# Altium PCB v1.5 PCB For Assembly Sheme.PcbDoc
Units mm, origin at the board's own origin, x right, y up, seen from the top; angles counter-clockwise.
Board outline 35.67 x 48.94 mm, 4 copper layers (Top Power Plane, Internal Ground Plane, Internal Signal Plane, Bottom Signal Layer), stack 0.972 mm thick; 78 components, 63 nets, 310 pads, 18 vias.
Unrouted connection lines stored in the file: 198.
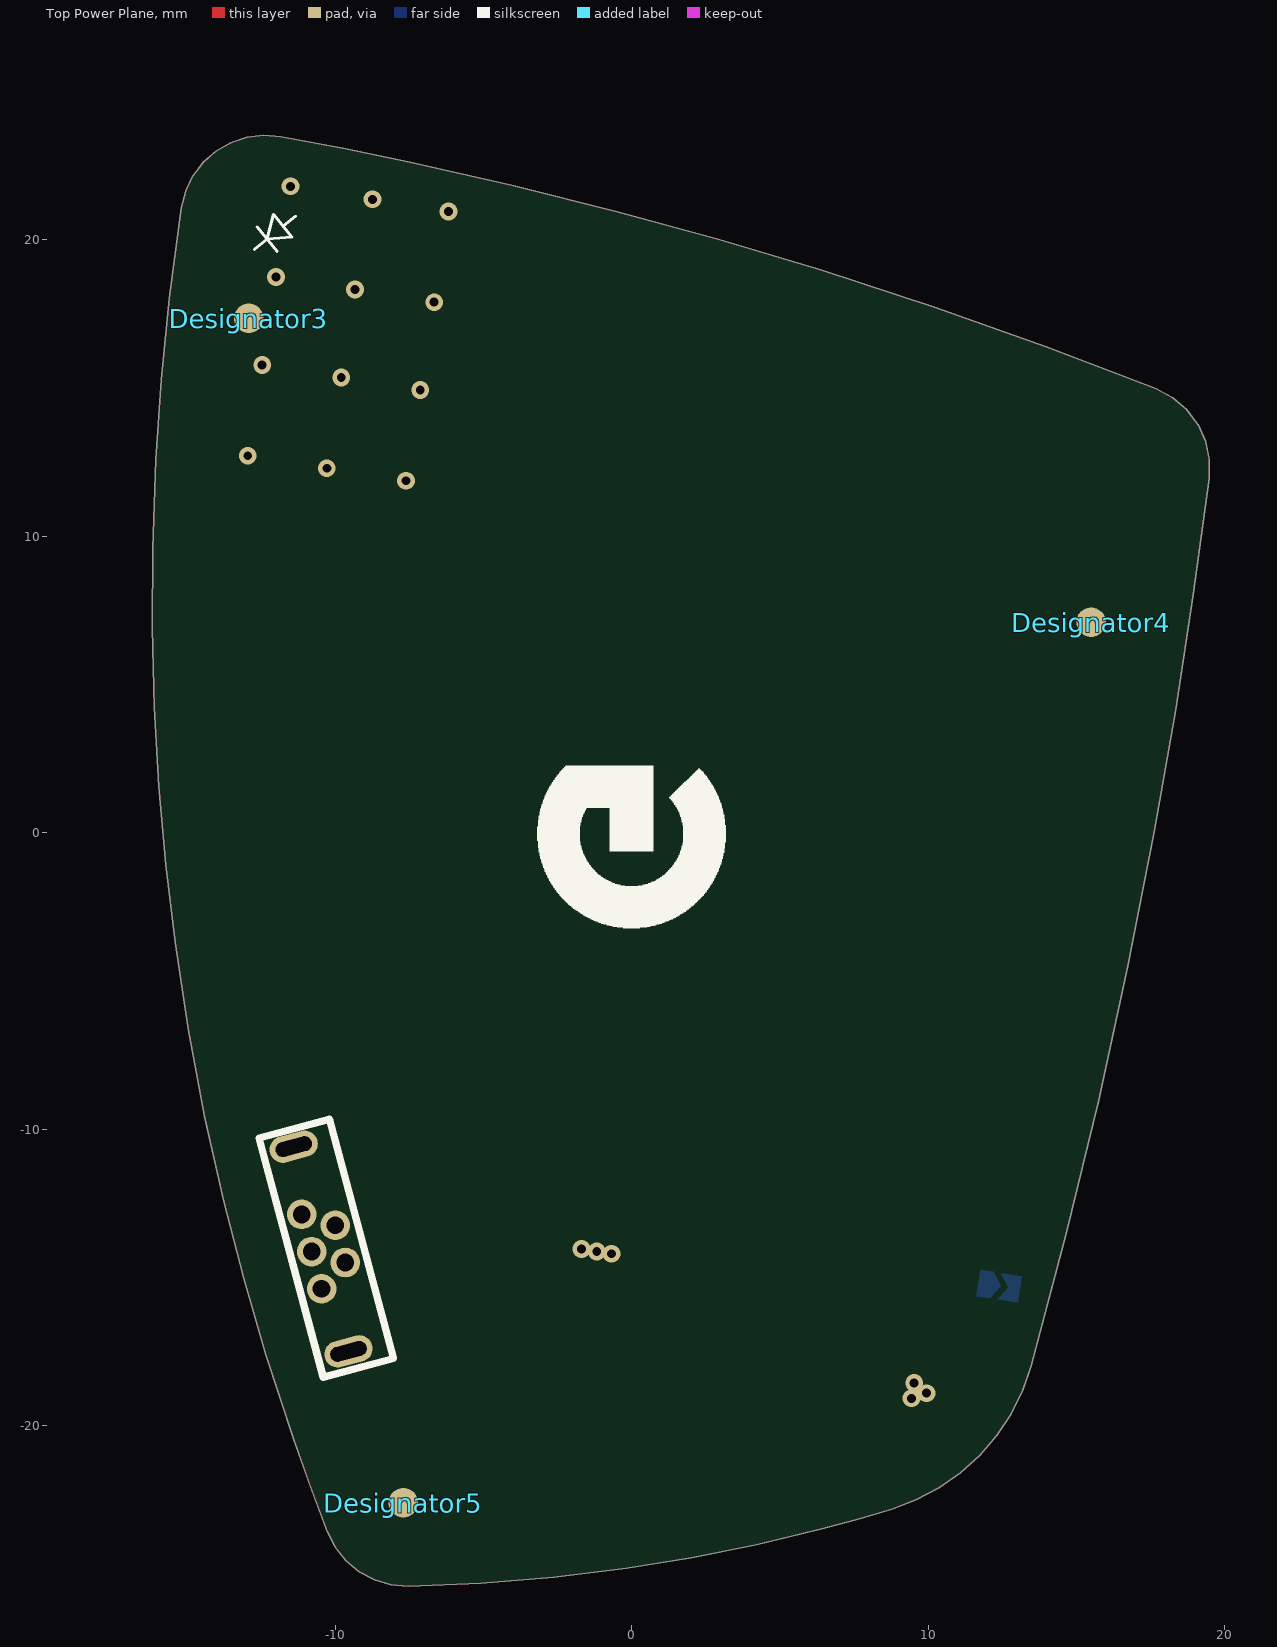
[diagram p0: Top Power Plane view]
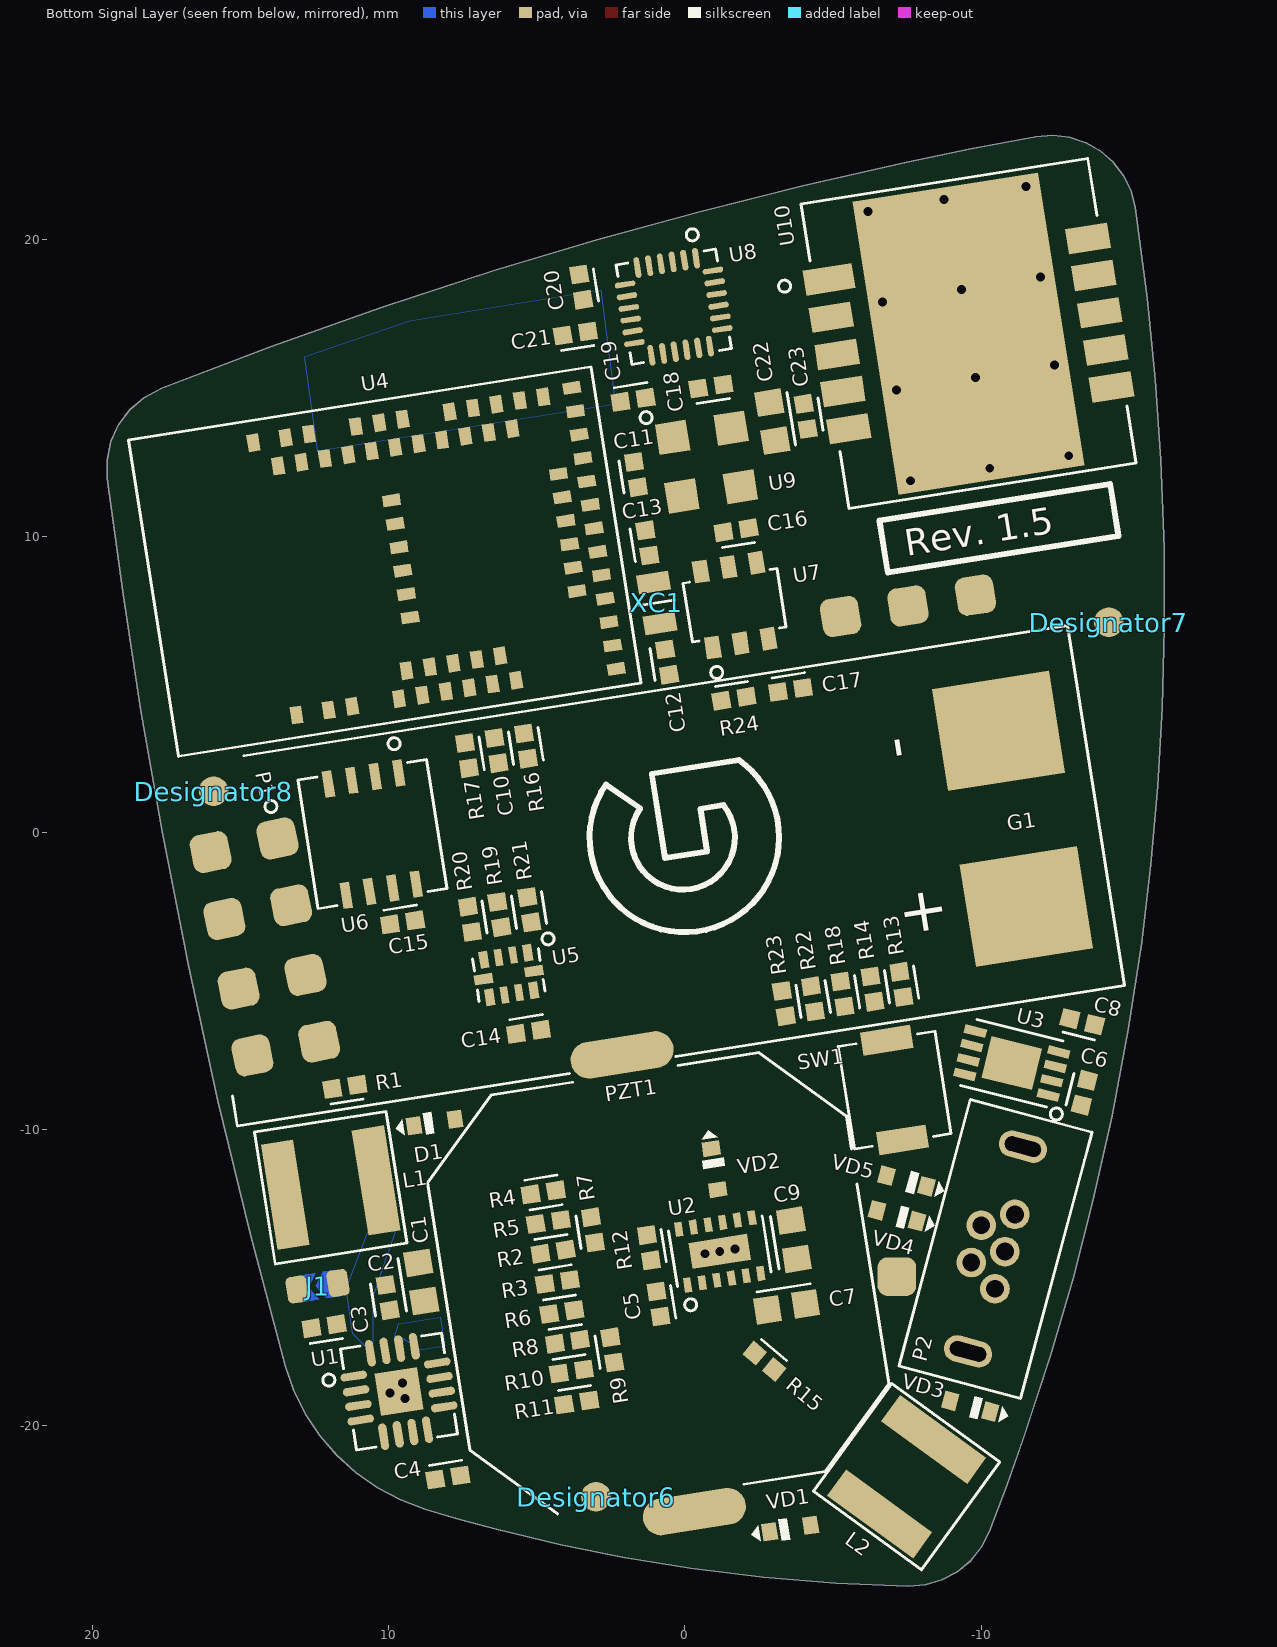
[diagram p1: Bottom Signal Layer view, seen from below]
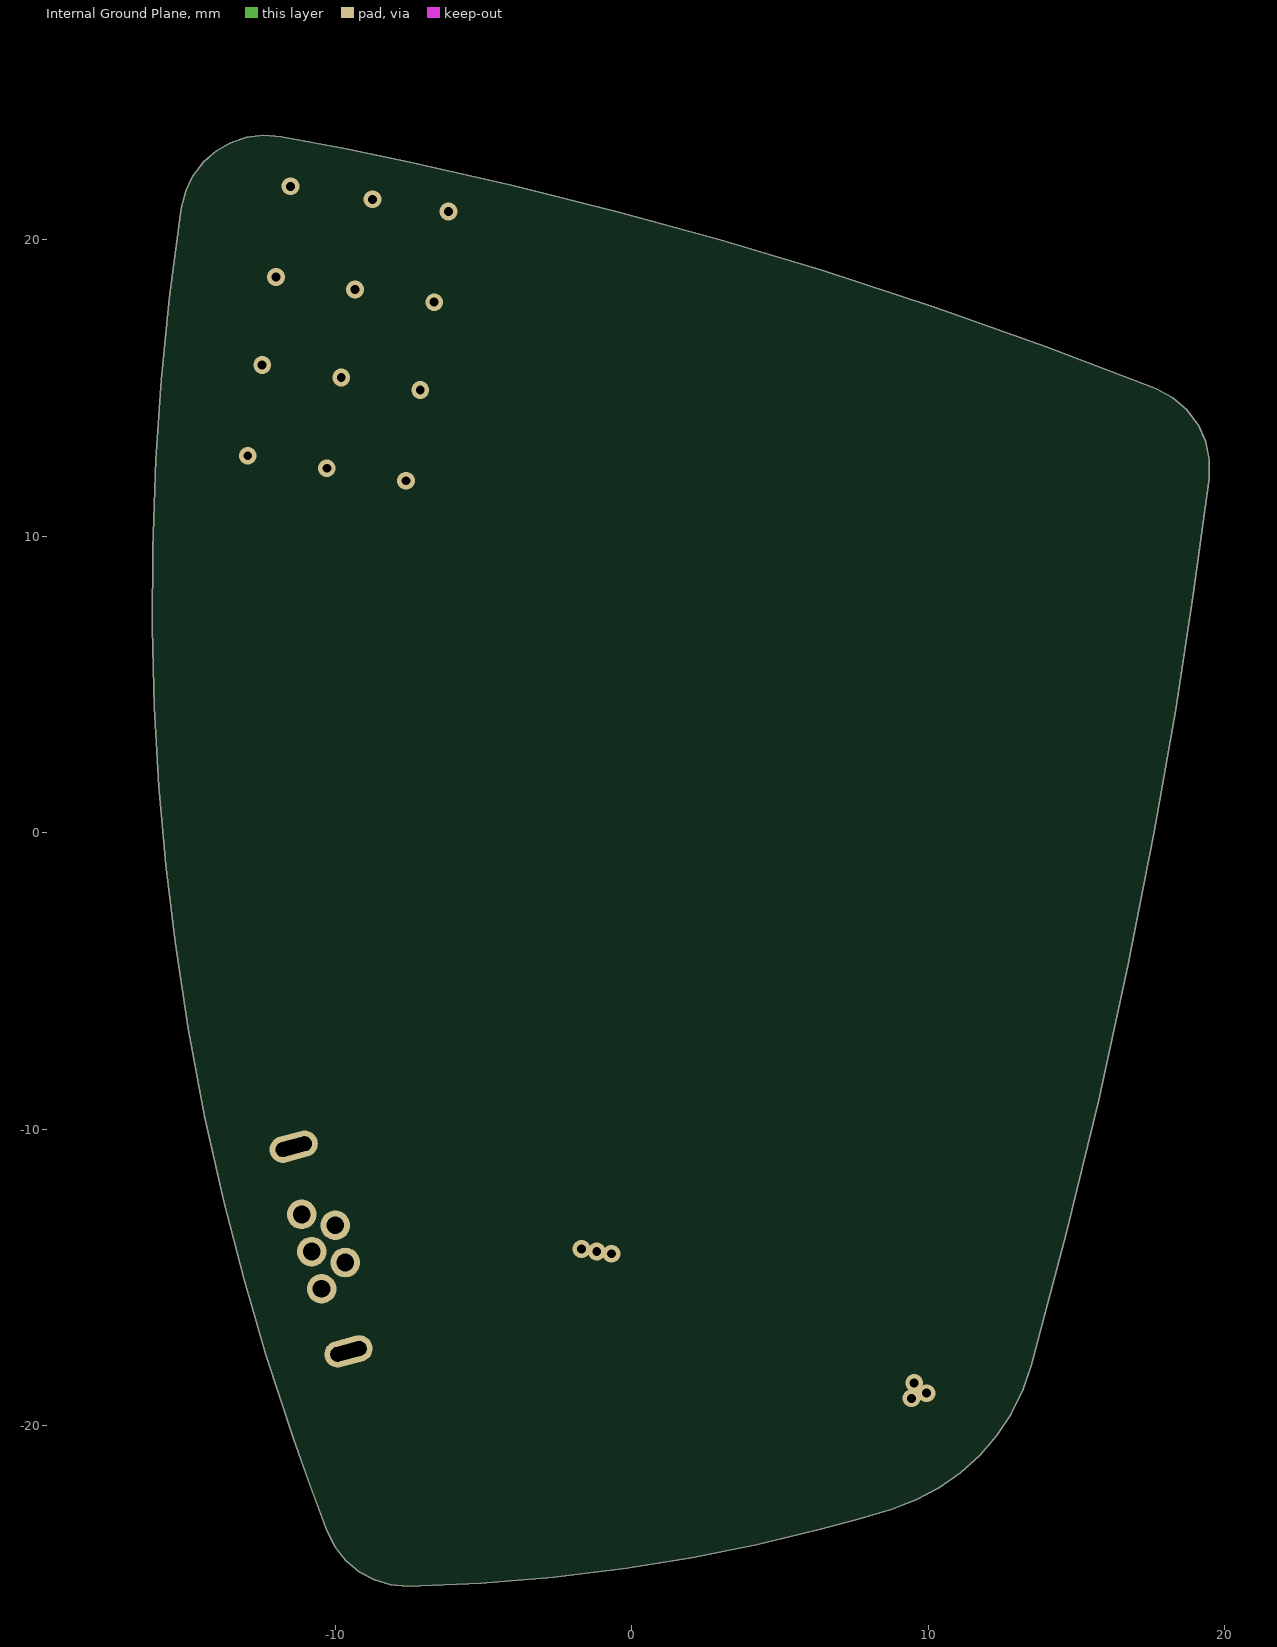
[diagram p2: Internal Ground Plane]
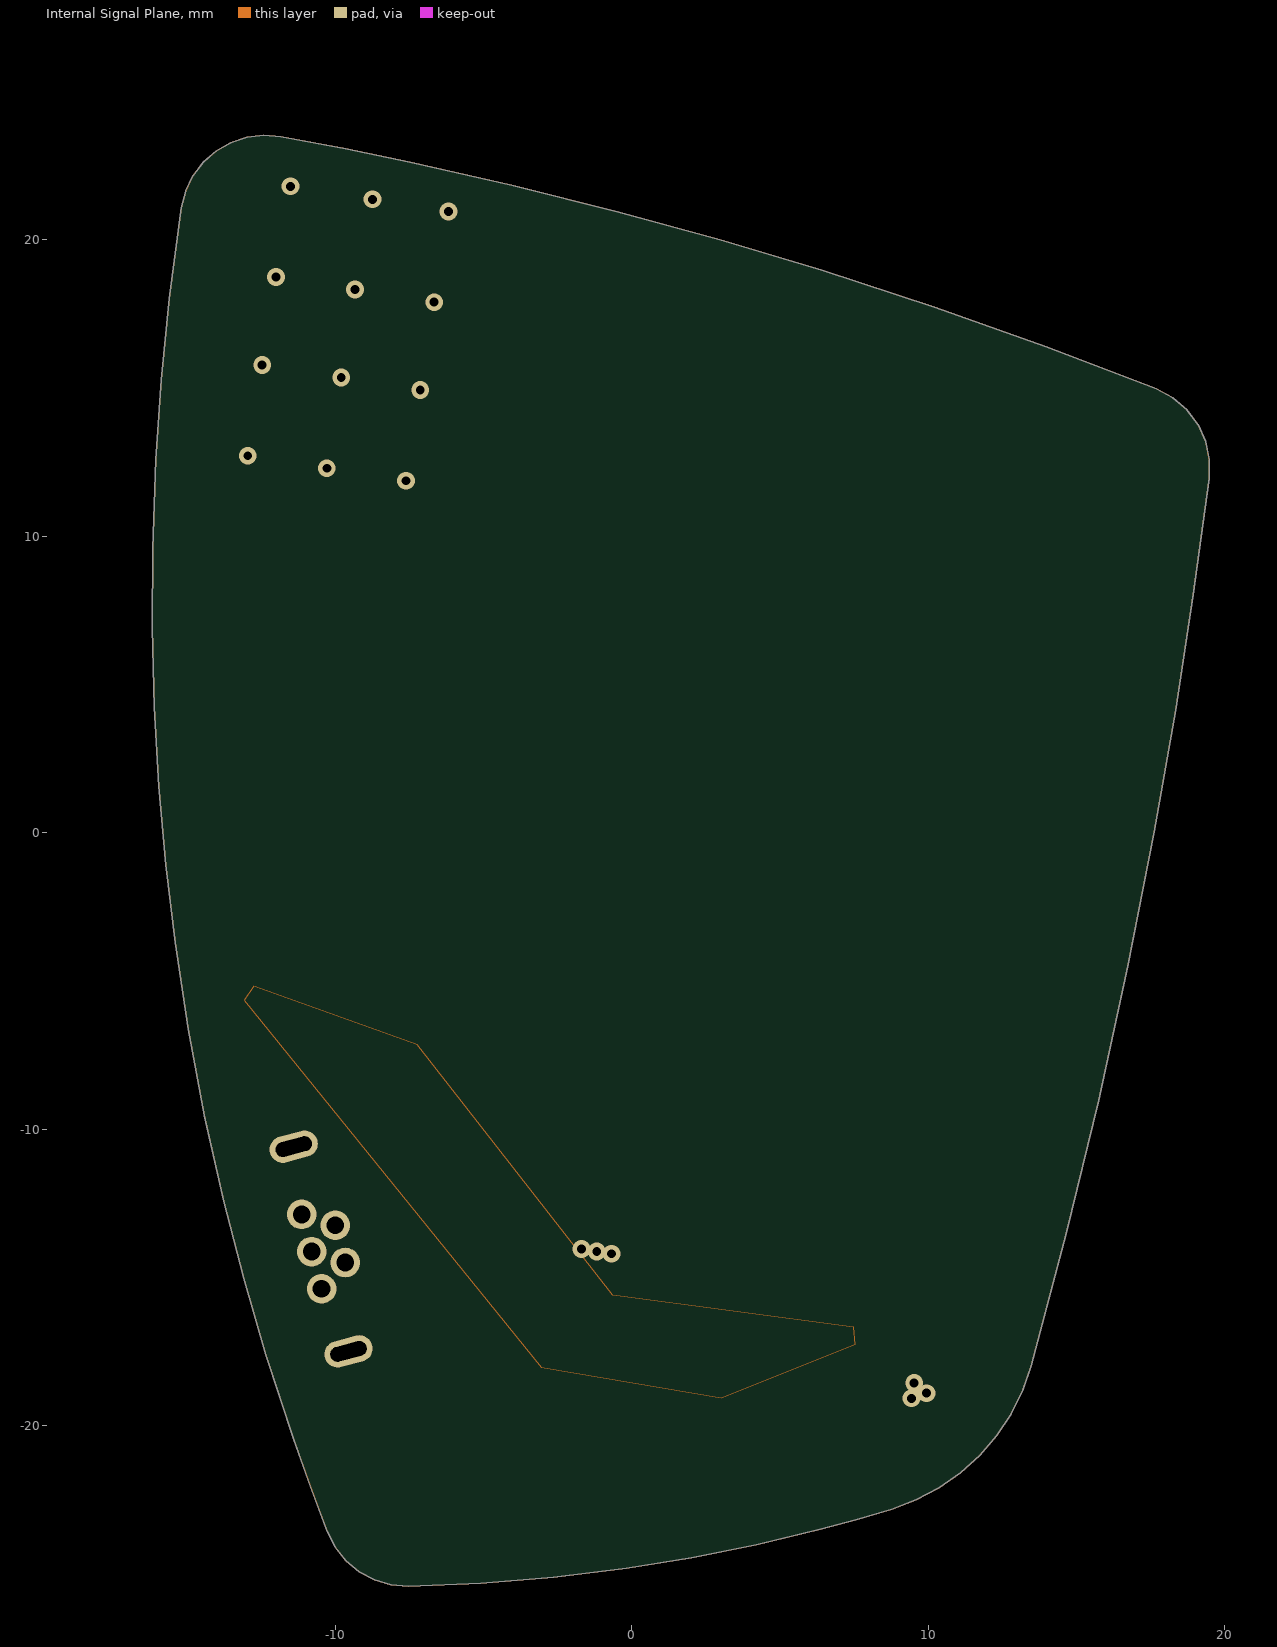
[diagram p3: Internal Signal Plane]

## Layer stack, top to bottom
Top Solder: solder mask 0.01, Solder Resist, Dk 3.5
Top Power Plane: signal copper 0.018
Dielectric 1: prepreg 0.2, FR-4, Dk 4.2
Internal Ground Plane: signal copper 0.018
Dielectric 5: core 0.5, FR-4, Dk 4.2
Internal Signal Plane: signal copper 0.018
Dielectric 6: prepreg 0.2, FR-4, Dk 4.2
Bottom Signal Layer: signal copper 0.018
Bottom Solder: solder mask 0.01, Solder Resist, Dk 3.5

## Board outline
13.483,-17.983 14.666,-13.524 15.752,-9.037 16.742,-4.516 17.633,0.028 18.349,4.133 18.953,8.035 19.483,11.945 19.493,12.574 19.366,13.189 19.108,13.762 18.731,14.264 18.254,14.673 17.699,14.968 13.978,16.394 10.218,17.727 6.418,18.966 2.97,19.999 -0.497,20.952 -3.981,21.824 -7.475,22.614 -9.651,23.063 -11.832,23.481 -12.405,23.527 -12.976,23.459 -13.521,23.279 -14.02,22.993 -14.451,22.613 -14.799,22.156 -15.048,21.638 -15.189,21.081 -15.59,18.029 -15.864,15.281 -16.051,12.573 -16.161,9.583 -16.174,6.898 -16.104,4.225 -15.952,1.565 -15.718,-1.082 -15.403,-3.717 -14.957,-6.634 -14.41,-9.538 -13.762,-12.432 -13.091,-15.028 -12.338,-17.611 -11.403,-20.474 -10.849,-22.033 -10.267,-23.581 -10.003,-24.101 -9.639,-24.556 -9.191,-24.929 -8.677,-25.203 -8.118,-25.367 -7.537,-25.415 -5.086,-25.317 -2.636,-25.117 -0.18,-24.815 2.019,-24.458 4.2,-24.02 6.355,-23.503 7.568,-23.174 8.774,-22.819 9.597,-22.509 10.375,-22.099 11.096,-21.595 11.748,-21.004 12.321,-20.337 12.806,-19.603 13.195,-18.814

## Design rules (kind name [scope] priority, off if disabled: settings)
BoardOutlineClearance [All] p1: gap=0.25 ignorepadtopadclearanceinfootprint=FALSE
Clearance Clearance_Fiducial [HasFootprint ('Fiducial mark')] p1: gap=0.505 ignorepadtopadclearanceinfootprint=FALSE except(0: Arc-Hole Track-Hole SMDPad-Hole THPad-Hole Via-Hole Fill-Hole Poly-Hole Region-Hole Text-Hole)
Clearance Clearance_NPTH [(InPadClass('NPTH'))] p2: gap=0.25 ignorepadtopadclearanceinfootprint=FALSE except(0: Arc-Hole Track-Hole SMDPad-Hole THPad-Hole Via-Hole Fill-Hole Poly-Hole Region-Hole Text-Hole)
Clearance Clearance_Poly [InPoly] p3: gap=0.2 ignorepadtopadclearanceinfootprint=FALSE except(0: Arc-Hole Track-Hole SMDPad-Hole THPad-Hole Via-Hole Fill-Hole Poly-Hole Region-Hole Text-Hole)
Clearance [All] p4: gap=0.125 ignorepadtopadclearanceinfootprint=FALSE except(0: Arc-Hole Track-Hole SMDPad-Hole THPad-Hole Via-Hole Fill-Hole Poly-Hole Region-Hole Text-Hole)
ComponentClearance [All] p1: gap=0 collisioncheckmode=3 verticalgap=0 showdistances=TRUE
DiffPairsRouting [All] p1: maxlimit=0.4 minlimit=0.125 mostfreqgap=0.25 toplayer_minwidth=0.125 toplayer_maxwidth=0.2 toplayer_prefwidth=0.125 midlayer2_minwidth=0.125 midlayer2_maxwidth=0.2 midlayer2_prefwidth=0.125 midlayer3_minwidth=0.125 midlayer3_maxwidth=0.2 midlayer3_prefwidth=0.125 bottomlayer_minwidth=0.125 bottomlayer_maxwidth=0.2 bottomlayer_prefwidth=0.125 maxuncoupledlength=12
FabricationTestpoint [All] p1: side=3 testpointundercomponent=TRUE minsize=1 maxsize=2.5 preferedsize=1.5 minholesize=0 maxholesize=1 preferedholesize=0.8 testpointgrid=0.025 allowsidetop=TRUE allowsidebottom=TRUE usegrid=TRUE gridtolerance=0
Height [All] p1: minheight=0 maxheight=50 prefheight=1
HoleSize [All] p1: absolutevalues=TRUE maxlimit=6 minlimit=0.3 maxpercent=80.000 minpercent=20.000
HoleToHoleClearance [All] p1: gap=0.2 allowstackedmicrovias=TRUE
MinimumAnnularRing [All] p1: minimumring=0.15
MinimumSolderMaskSliver [All] p1: minsoldermaskwidth=0.15
NetAntennae [All] p1: netantennaetolerance=0.15
PasteMaskExpansion [All] p1: expansion=0.05
PlaneClearance PlaneClearance_NPTH [InPadClass('NPTH')] p1: clearance=0.25
PlaneClearance [All] p2: clearance=0.2
PlaneConnect [All] p1: planeconnectstyle=Relief reliefexpansion=0.2 reliefentries=4 reliefconductorwidth=0.15 reliefairgap=0.2
PolygonConnect PolygonConnect_2 [All vs IsNamedPolygon('NETL1_2_L04_P015')] p1: connectstyle=Direct reliefconductorwidth=0.254 reliefentries=4 polygonreliefangle="90 Angle" airgapwidth=0.254
PolygonConnect PolygonConnect_1 [All vs IsNamedPolygon('VCC_CHARGE_3.0_-_4.2_V_L04_P017')] p2: connectstyle=Direct reliefconductorwidth=0.254 reliefentries=4 polygonreliefangle="90 Angle" airgapwidth=0.254
PolygonConnect PolygonConnect_TPS62740 [HasFootprint('TPS62740') vs IsNamedPolygon('Internal Ground Plane-GND')] p3: connectstyle=Relief reliefconductorwidth=0.2 reliefentries=4 polygonreliefangle="90 Angle" airgapwidth=0.35
PolygonConnect PolygonConnect_BQ25504 [HasFootprint('BQ25504') vs IsNamedPolygon('Internal Ground Plane-GND')] p4: connectstyle=Relief reliefconductorwidth=0.2 reliefentries=4 polygonreliefangle="90 Angle" airgapwidth=0.35
PolygonConnect PolygonConnect_ORG1411 [HasFootprint('ORG1411-PM01') vs IsNamedPolygon('Internal Ground Plane-GND')] p5: connectstyle=Direct reliefconductorwidth=0.254 reliefentries=4 polygonreliefangle="90 Angle" airgapwidth=0.254
PolygonConnect PolygonConnect_Via [IsVia] p6: connectstyle=Direct reliefconductorwidth=0.254 reliefentries=4 polygonreliefangle="90 Angle" airgapwidth=0.254
PolygonConnect [All] p7: connectstyle=Relief reliefconductorwidth=0.2 reliefentries=4 polygonreliefangle="45 Angle" airgapwidth=0.2
RoutingCorners [All] p1: cornerstyle=45-Degree minsetback=1 maxsetback=2.5
RoutingVias [All] p1: holewidth=0.3 width=0.6 viastyle="Through Hole" minholewidth=0.3 minwidth=0.6 maxholewidth=6 maxwidth=6.3
SilkToSilkClearance [All] p1: silktosilkclearance=0
SilkToSolderMaskClearance [IsPad] p1: minsilkscreentomaskgap=0.05 clearancetoexposedcopper=TRUE
SolderMaskExpansion [All] p1: expansion=0.05 istentingtop=FALSE
Width [All] p1: maxlimit=1.5 minlimit=0.125 preferedwidth=0.15 checkconnectedcopper=TRUE
16 further rules are at their usual default settings.

## Classes and differential pairs
component class "Ungravity 1.5 GPS": C22 C23 U10
component class "Ungravity 1.5 IMU & Baro": C18 C19 C20 C21 U8 U9
component class "Ungravity 1.5 MCU": C10 C11 C12 C13 "MCU pull-up/down 1" "MCU pull-up/down 2" "MCU pull-up/down 3" "MCU pull-up/down 4" "MCU pull-up/down 5" "MCU pull-up/down 6" "MCU pull-up/down 7" P1 R16 R17 R18 U4 XC1
component class "Ungravity 1.5 Power": C5 C6 C7 C8 C9 L2 R12 R13 R14 R15 SW1 U3
component class "Ungravity 1.5 Solar": C1 C2 C3 C4 D1 G1 J1 L1 R1 R2 R3 R4 R5 R6 R7 R8 R9 R10 R11 U1
component class "Ungravity 1.5 Flash & Buzzer": C14 C15 PZT1 R19 R20 R21 U5 U6 VD1 VD2
component class "Ungravity 1.5 Touch & USB": C16 C17 P2 R22 R23 R24 U7 VD3 VD4 VD5

## Components (designator, comment, footprint, x,y, rotation, side; value= is the part's Value field where it differs from the comment)
C1 "10 uF" 0603 8.895,-15.153 r81 bottom
C2 "0.01 uF" 0402 10.027,-15.686 r81 bottom
C3 "4.7 uF" 0402 12.175,-16.65 r171 bottom
C4 "0.01 uF" 0402 8,-21.75 r171 bottom
C5 "0.1 uF" 0402 0.889,-15.9 r261 bottom
C6 "4.7 uF" 0402 -13.475,-8.775 r104 bottom
C7 "10 uF" 0603 -3.425,-16 r171 bottom
C8 "4.7 uF" 0402 -13.4,-6.375 r194 bottom
C9 "10 uF" 0603 -3.675,-13.732 r81 bottom
C10 "0.1 uF" 0402 6.359,2.771 r261 bottom
C11 "4.7 uF" 0402 1.65,12.075 r261 bottom
C12 "8 pF" 0402 0.6,5.75 r261 bottom
C13 "8 pF" 0402 1.268,9.773 r81 bottom
C14 "4.7 uF" 0402 5.277,-6.719 r171 bottom
C15 "0.1 uF" 0402 9.525,-3.025 r351 bottom
C16 "0.1 uF" 0402 -1.725,10.2 r171 bottom
C17 "Do not assemble (else - 8 pF)" 0402 -3.561,4.815 r171 bottom
C18 "0.1 uF" 0402 -0.875,15.05 r171 bottom
C19 "0.1 uF" 0402 1.75,14.6 r351 bottom
C20 "0.1 uF" 0402 3.5,18.4 r81 bottom
C21 "0.1 uF" 0402 3.698,16.839 r351 bottom
C22 "10 uF" 0603 -2.944,13.863 r261 bottom
C23 "0.1 uF" 0402 -4.077,14.039 r261 bottom
D1 "BAS16XV2T1G" SOD-523 8.45,-9.775 r351 bottom
Designator3 "Comment" "FIDUCIAL MARK" -12.916,17.348 r0 top
Designator4 "Comment" "FIDUCIAL MARK" 15.5,7.1 r0 top
Designator5 "Comment" "FIDUCIAL MARK" -7.7,-22.6 r0 top
Designator6 "Comment" "FIDUCIAL MARK" 3,-22.4 r180 bottom
Designator7 "Comment" "FIDUCIAL MARK" -14.3,7.1 r180 bottom
Designator8 "Comment" "FIDUCIAL MARK" 15.9,1.4 r180 bottom
G1 "LiPo 150 mA*h" LPV551230 1.1,-1.45 r261 bottom locked
J1 "Jumper" "0603 - JUMPER" 12.4,-15.3 r351 bottom
L1 "IFSC1515AHER220M01 22 uH" IFSC1515-AH-01 11.95,-11.975 r171 bottom
L2 "IFSC1515AHER2R2M01 2.2 uH" IFSC1515-AH-01 -7.475,-21.725 r306 bottom locked
P1 "Test сonnector pads" "TEST CONNECTOR" 13.745,-0.196 r258.4 bottom locked
P2 "U-E-M5SS-W-0" U-E-M5SS-W-0 -10.475,-14.047 r285 bottom locked
PZT1 "SMAT-13S" "SMAT-13-MOUNT BY WIRE" 0.9,-15.2 r261 bottom locked
R1 "250 R" 0402 11.475,-8.575 r171 bottom
R2 "3.9 M" 0402 4.445,-14.139 r171 bottom
R3 "5.49 M" 0402 4.301,-15.156 r171 bottom
R4 "3.65 M" 0402 4.781,-12.133 r171 bottom
R5 "6 M" 0402 4.607,-13.131 r171 bottom
R6 "1 M" 0402 4.155,-16.174 r171 bottom
R7 "10 M" 0402 3.1,-13.4 r261 bottom
R8 "4.87 M" 0402 3.962,-17.173 r171 bottom
R9 "5.49 M" 0402 2.45,-17.45 r261 bottom
R10 "3.9 M" 0402 3.829,-18.179 r171 bottom
R11 "3.9 M" 0402 3.65,-19.225 r351 bottom
R12 "500 R" 0402 1.211,-14.002 r261 bottom
R13 "6.6 K" 0402 -7.307,-5.12 r261 bottom
R14 "6.6 K" 0402 -6.325,-5.275 r81 bottom
R15 "6.6 K" 0402 -2.685,-17.835 r220 bottom
R16 "5.76 M" 0402 5.359,2.921 r261 bottom
R17 "3.9 M" 0402 7.35,2.6 r81 bottom
R18 "500 R" 0402 -5.316,-5.443 r261 bottom
R19 "6.6 K" 0402 6.26,-2.765 r261 bottom
R20 "6.6 K" 0402 7.25,-2.925 r81 bottom
R21 "6.6 K" 0402 5.25,-2.6 r81 bottom
R22 "27 R" 0402 -4.323,-5.605 r261 bottom
R23 "27 R" 0402 -3.337,-5.769 r261 bottom
R24 "6.6 K" 0402 -1.649,4.515 r171 bottom
SW1 "B3U-1000P" B3U-1000P -7.074,-8.685 r261 bottom locked
U1 "BQ25504" BQ25504 9.647,-18.851 r171 bottom locked
U2 "TPS62740DSSR" TPS62740 -1.175,-14.125 r81 bottom
U3 "MCP73832-2ATI/MC" MCP73832-2ATI/MC -11.025,-7.775 r14 bottom locked
U4 "MDBT50Q-P1MV2 (NRF52840)" MDBT50Q-P1M 10.166,9.393 r81 bottom locked
U5 "TLV9002SIRUGR" X2QFN 5.943,-4.804 r351 bottom locked
U6 "MX25R6435FZAIL0" MX25R6435F-ZA 10.543,-0.049 r261 bottom locked
U7 "TTP223-BA6" SOT23-6 -1.675,7.675 r81 bottom
U8 "ICM20948" ICM20948 0.38,17.739 r261 bottom locked
U9 "MS5637" MS5637-02BA03 -0.725,12.5 r171 bottom locked
U10 "ORG1410-PM01" ORG1410-PM01 -9.562,16.836 r351 bottom locked
VD1 "PESD5Z5.0" SOD-523 -3.55,-23.475 r351 bottom
VD2 "PESD5Z5.0" SOD-523 -0.996,-11.351 r81 bottom
VD3 "PESD5Z5.0" SOD-523 -9.625,-19.35 r195 bottom
VD4 "PESD5Z5.0" SOD-523 -7.15,-12.925 r195 bottom
VD5 "PESD5Z7.0" SOD-523 -7.475,-11.75 r195 bottom
XC1 "9HT11-32.768KDZY-T" 9HT11 0.95,7.75 r81 bottom

## Footprints (in the part's own frame and the unit in brackets; to place one, negate y for a bottom-side part, rotate by r counter-clockwise, add the part's x,y. Pads: shape width x height; smd on the part's side, far side on the other; paste and mask are expansions set on the pad)
9HT11 [mm] "Qartz crystal 9HT11-32.768KDZY-T"
  rect 0.65x1.1 smd mask+0.05: 1(-0.7,0) 2(0.7,0)
  silkscreen extent 0,-0.6 0,0.6, body extent -1,-0.6 1,0.6, height 0.5
0402 [mm] "Standard SMD component"
  rect 0.6x0.6 smd mask+0.05: 1(-0.43,0) 2(0.43,0)
  silkscreen extent -0.55,0.5 0.55,0.5, body extent -0.55,-0.28 0.55,0.28, height 0.55
0603 [mm] "Standard SMD component"
  rect 0.85x0.9 smd mask+0.05: 1(-0.65,0) 2(0.65,0)
  silkscreen extent -0.9,0.65 0.9,0.65, body extent -0.9,-0.5 0.9,0.5, height 1
"0603 - JUMPER" [mm] "Standard SMD component"
  rrect50% 0.7x0.9 smd mask+0.05: 1(-0.711,0) 2(0.696,0)
  Top Power Plane region: -0.711,0.45 -0.25,0.45 0.05,0 -0.25,-0.45 -0.711,-0.45
  Top Power Plane region: 0.696,-0.45 0,-0.45 0.3,0 0,0.45 0.696,0.45
B3U-1000P [mm] "Tact switch"
  rect 0.8x1.7 smd mask+0.05: 1(-1.7,0) 2(1.7,0)
  silkscreen extent -1.75,-1.65 1.75,1.65, body extent -1.6,-1.5 1.6,1.5, height 1.6
BQ25504 [mm] "Solar harvester"
  rect 1.45x1.45 smd mask+0.05: 0(0,0)
  oval 0.9x0.28 smd mask+0.05: 1(-1.425,0.75) 2(-1.425,0.25) 3(-1.425,-0.25) 4(-1.425,-0.75) 9(1.425,-0.75) 10(1.425,-0.25) 11(1.425,0.25) 12(1.425,0.75)
  oval 0.28x0.9 smd mask+0.05: 5(-0.75,-1.425) 6(-0.25,-1.425) 7(0.25,-1.425) 8(0.75,-1.425) 13(0.75,1.425) 14(0.25,1.425) 15(-0.25,1.425) 16(-0.75,1.425)
  silkscreen extent -2.48,-1.73 1.73,1.73, body extent -1.58,-1.58 1.58,1.58, height 1
"FIDUCIAL MARK" [mm]
  round 1 smd mask+0.5: 0(0,0)
ICM20948 [mm] "9-DOF IMU"
  oval 0.7x0.2 smd mask+0.05: 1(-1.5,1) 2(-1.5,0.6) 3(-1.5,0.2) 4(-1.5,-0.2) 5(-1.5,-0.6) 6(-1.5,-1) 13(1.5,-1) 14(1.5,-0.6) 15(1.5,-0.2) 16(1.5,0.2) 17(1.5,0.6) 18(1.5,1)
  oval 0.2x0.7 smd mask+0.05: 7(-1,-1.5) 8(-0.6,-1.5) 9(-0.2,-1.5) 10(0.2,-1.5) 11(0.6,-1.5) 12(1,-1.5) 19(1,1.5) 20(0.6,1.5) 21(0.2,1.5) 22(-0.2,1.5) 23(-0.6,1.5) 24(-1,1.5)
  silkscreen extent -2.5,-1.7 1.7,1.7, body extent -1.55,-1.6 1.55,1.5, height 1.05
IFSC1515-AH-01 [mm] "Inductor"
  rect 1.1x3.6 smd mask+0.05: 1(-1.55,0) 2(1.55,0)
  silkscreen extent -2.25,-2.25 2.25,2.25, body extent -2.1,-2.1 2.1,2.1, height 1.9
LPV551230 [mm] "LiPo accumulator"
  rect 3.5x4 smd: 1(3,12.3) 2(-3,12.3)
  silkscreen extent -6.15,-15.15 6.15,15.15, body extent -6,-15 6,15, height 6.35
MCP73832-2ATI/MC [mm]
  rect 1.75x1.45 smd mask+0.05: 0(0,0)
  rect 0.75x0.3 smd mask+0.05: 1(-1.45,0.75) 2(-1.45,0.25) 3(-1.45,-0.25) 4(-1.45,-0.75) 5(1.45,-0.75) 6(1.45,-0.25) 7(1.45,0.25) 8(1.45,0.75)
  silkscreen extent -2.08,-1.15 1.5,1.5, body extent -1.5,-1 1.5,1, height 1
MDBT50Q-P1M [mm] "Bluetooth 5.0 module"
  rect 0.6x0.4 smd mask+0.05: 1(-4.9,3.75) 2(-4.9,2.65) 3(-4.9,1.85) 4(-4.9,0.25) 5(-4,-0.15) 6(-4.9,-0.55) 7(-4,-0.95) 8(-4.9,-1.35) 9(-4,-1.75) 10(-4.9,-2.15) 11(-4,-2.55) 12(-4.9,-2.95) 13(-4,-3.35) 14(-4.9,-3.75) 34(4.4,-6.15) 35(4.4,-5.35) 36(3.5,-4.95) 37(4.4,-4.55) 38(3.5,-4.15) 39(4.4,-3.75) 40(3.5,-3.35) 41(4.4,-2.95) 42(3.5,-2.55) 43(3.5,-1.75) 44(4.4,-1.35) 45(3.5,-0.95) 46(4.4,-0.55) 47(3.5,-0.15) 48(4.4,0.25) 49(3.5,0.65) 50(3.5,1.45) 51(4.4,1.85) 52(3.5,2.25) 53(4.4,2.65) 54(3.5,3.05) 55(4.4,3.75)
  rect 0.4x0.6 smd mask+0.05: 15(-5.05,-7.15) 16(-4.25,-7.15) 17(-3.45,-7.15) 18(-2.65,-7.15) 19(-2.25,-6.25) 20(-1.85,-7.15) 21(-1.45,-6.25) 22(-1.05,-7.15) 23(-0.65,-6.25) 24(-0.25,-7.15) 25(0.15,-6.25) 26(0.55,-7.15) 27(0.95,-6.25) 28(1.35,-7.15) 29(1.75,-6.25) 30(2.15,-7.15) 31(2.95,-7.15) 32(3.75,-7.15) 33(4.55,-7.15) 56(-2.25,-0.55) 57(-1.45,-0.55) 58(-0.65,-0.55) 59(0.15,-0.55) 60(0.95,-0.55) 61(1.75,-0.55)
  silkscreen extent -5.65,-7.9 5.15,7.9, body extent -5.5,-7.75 5,7.7, height 2
MS5637-02BA03 [mm] "Barometer"
  rect 1.05x1.05 smd mask+0.05: 1(-1,1) 2(-1,-1) 3(1,-1) 4(1,1)
  silkscreen extent -1.98,1.6 -1.57,2, body extent -1.5,-1.5 1.5,1.5, height 0.9
MX25R6435F-ZA [mm] "64 MB Flash"
  rect 0.9x0.325 smd mask+0.05: 1(-1.9,1.2) 2(-1.9,0.4) 3(-1.9,-0.4) 4(-1.9,-1.2) 5(1.9,-1.2) 6(1.9,-0.4) 7(1.9,0.4) 8(1.9,1.2)
  silkscreen extent -3.1,-2.2 2.2,2.2, body extent -2.05,-2.05 2.05,2.05, height 0.6
ORG1410-PM01 [mm] "GPS module"
  rect 6.35x10.008 smd mask+0.05: 0(0,0)
  rect 1.676x0.864 smd mask+0.05: 1(4.359,-2.54)
  rect 1.422x0.864 smd mask+0.05: 2(4.486,-1.27) 3(4.486,0) 4(4.486,1.27) 5(4.486,2.54) 6(-4.486,2.54) 7(-4.486,1.27) 8(-4.486,0) 9(-4.486,-1.27) 10(-4.486,-2.54)
  silkscreen extent -4.9,-5.2 6.08,5.2, body extent -4.75,-5.05 4.75,5.05, height 5.8
"SMAT-13-MOUNT BY WIRE" [mm] "Piezo transducer"
  oval 1.25x3.5 smd mask+0.05: 1(-7.8,0) 2(7.8,0)
  silkscreen extent -7.15,-7.15 7.15,7.15, body extent -7,-7 7,7, height 6.5
SOD-523 [mm] "Standard SMD component"
  rect 0.5x0.6 smd mask+0.05: 1(-0.7,0) 2(0.7,0)
  silkscreen extent 0.05,-0.37 1.32,0.38, body extent -0.63,-0.42 0.62,0.43, height 0.65
SOT23-6 [mm] "Standard SMD component"
  rect 0.75x0.5 smd mask+0.05: 1(-1.3,0.95) 2(-1.3,0) 3(-1.3,-0.95) 4(1.3,-0.95) 5(1.3,0) 6(1.3,0.95)
  silkscreen extent -2.35,-1.6 1,1.6, body extent -0.85,-1.45 0.85,1.45, height 1.26
"TEST CONNECTOR" [mm] "Pads for spring-loaded connector"
  rrect50% 1.3x1.3 smd mask+0.05: 1(0,0) 2(0,-2.3) 3(2.3,0) 4(2.3,-2.3) 5(4.7,0) 6(4.7,-2.3) 7(7,0) 8(7,-2.3)
  silkscreen extent -1.3,-0.2 -0.9,0.2
TPS62740 [mm] "DC/DC voltage regulator"
  rect 0.9x2 smd paste-0.45 mask+0.05: 0(0,0)
  rect 0.5x0.25 smd mask+0.05: 1(-0.95,1.25) 2(-0.95,0.75) 3(-0.95,0.25) 4(-0.95,-0.25) 5(-0.95,-0.75) 6(-0.95,-1.25) 7(0.95,-1.25) 8(0.95,-0.75) 9(0.95,-0.25) 10(0.95,0.25) 11(0.95,0.75) 12(0.95,1.25)
  silkscreen extent -1.83,-1.6 0.95,1.6, body extent -0.95,-1.45 0.95,1.45, height 0.8
U-E-M5SS-W-0 [mm] "micro-USB port"
  round 1 hole 0.6 mask+0.05: 1(-1.3,0.33) 2(-0.65,-0.67) 3(0,0.33) 4(0.65,-0.67) 5(1.3,0.33)
  oval 0.9x1.65 hole 0.5 slot 1.25 at 90 deg mask+0.05: 5(-3.575,0) 5(3.575,0)
  silkscreen extent -4.65,-2.13 4.65,2.13, body extent -4.5,-1.97 4.5,1.98, height 6
X2QFN [mm] "Standard package"
  rect 0.3x0.58 smd mask+0.05: 1(-0.75,-0.64) 4(0.75,-0.64) 6(0.75,0.64) 9(-0.75,0.64)
  rect 0.25x0.58 smd mask+0.05: 2(-0.25,-0.64) 3(0.25,-0.64) 7(0.25,0.64) 8(-0.25,0.64)
  rect 0.63x0.35 smd mask+0.05: 5(0.86,0) 10(-0.86,0)
  silkscreen extent -1.7,-1.2 1.12,0.73, body extent -0.98,-0.72 0.97,0.73, height 0.4

## Part data
C1 C2 C3 C4 C5 C6 C7 C8 C9 C10 C11 C12 C13 C14 C15 C16 C17 C18 C19 C20 C21 C22 C23: library part Capasistor
D1: library part Diode
G1: library part Accumulator
L1 L2: library part Inductor
P1: library part "Test ñonnector pads"
P2: library part "micro-USB port"
PZT1: library part "Piezo transducer"
R1 R2 R3 R4 R5 R6 R7 R8 R9 R10 R11 R12 R13 R14 R15 R16 R17 R18 R19 R20 R21 R22 R23 R24: library part Resistor
SW1: library part "Tact switch"
U2: library part TPS62740
U4: library part MDBT50Q
U5: library part TLV9002S
U6: library part MX25R6435F-ZA
U9: library part MS5637-02BA03
VD1 VD2 VD3 VD4 VD5: library part Stabilitron
XC1: library part Qartz

## Free pads (board coordinates)
  round 7 on Top Solder mask+0.05: 6(10.3,-20.7) 7(10,-20.5)
  rrect50% 1.3x1.3 smd far side: 39(-7.15,-14.975)
  rrect50% 1.3x1.3 smd far side rot 81: 40(-9.797,8.01) 40(-7.525,7.65) 40(-5.253,7.29)

## Via types
v1: diameter 0.6, hole 0.3, Top Power Plane to Bottom Signal Layer, tented both sides, 18 vias

## Nets (pads, with @x,y where several pads share a name; then routed paths per layer and width w, separated by ;. In a path a pad name is that pad's centre, name@x,y a point inside that pad or via, vN(x,y) a via of type N, cw(c..) or ccw(c..) an arc to the next point about the centre after c; other vN are vias at no path point)
AGND: C4.2 R2.1 R7.2 R10.2 R11.2 U1.12
GND: C1.2 C2.2 C3.2 C5.2 C6.2 C7.2 C8.2 C9.2 C10.2 C11.2 C12.2 C13.2 C14.2 C15.2 C16.2 C17.2 C18.2 C19.2 C20.2 C21.2 C22.2 C23.2 G1.2 P1.8 P2.5 pad.40@-9.797,8.01 R14.2 R15.2 R17.1 R20.2 R21.2 R24.2 SW1.2 U1.0 U1.1 U1.5 U1.13 U2.0 U2.3 U2.8 U2.9 U2.10 U2.11 U3.0 U3.6 U4.1 U4.2 U4.15 U4.33 U4.55 U5.1 U6.4 U7.2 U7.4 U7.6 U8.11 U8.18 U8.20 U9.4 U10.0 U10.5 VD1.1 VD2.1 VD3.1 VD4.1 VD5.1
  other v1: 9.443,-19.081 9.951,-18.909 9.532,-18.564 -0.677,-14.204 -1.175,-14.125 -1.686,-14.044 -7.615,11.87 -10.282,12.293 -12.948,12.715 -7.13,14.932 -9.797,15.354 -12.463,15.777 -6.661,17.895 -9.327,18.318 -11.994,18.74 -6.176,20.957 -8.744,21.364 -11.509,21.802
NetC3_1: C3.1 D1.2 J1.2 L1.1 P1.6 R4.1 U1.2
NetC4_1: C4.1 U1.4
NetC10_1: C10.1 R16.1 R17.2 U4.14
NetC12_1: C12.1 U4.17 XC1.1
NetC13_1: C13.1 U4.18 XC1.2
NetC17_1: C17.1 U7.3
NetC21_1: C21.1 U8.10
NetD1_1: D1.1 R1.2
NetJ1_1: J1.1 P1.5
NetL1_2: L1.2 U1.16
NetL2_2: L2.2 U2.2
NetLED1_1: R18.1
NetLED1_2: R13.1 U4.16
NetP1_3: P1.3 pad.40@-5.253,7.29 U4.53
NetP1_4: P1.4 pad.40@-7.525,7.65 U4.51
NetP2_2: P2.2 R23.2 VD4.2
NetP2_3: P2.3 R22.2 VD3.2
NetPZT1_1: PZT1.1 U5.8 VD2.2
NetPZT1_2: PZT1.2 U5.6 VD1.2
NetR2_2: R2.2 R3.1 U1.10
NetR3_2: R3.2 R6.1 U1.9
NetR4_2: R4.2 R5.1 U1.3
NetR5_2: R5.2 R7.1
NetR6_2: R6.2 R8.1 R9.1 U1.7
NetR8_2: R8.2 R10.1 U1.6
NetR9_2: R9.2 R11.1 U1.8
NetR12_1: R12.1 U1.11
NetR12_2: R12.2 SW1.1 U2.12
NetR13_2: R13.2 U3.5
NetR14_1: R14.1 U3.8
NetR15_1: R15.1 U2.4 U4.4
NetR19_2: R19.2 R20.1 U5.4 U5.9
NetR21_1: R21.1 U4.6 U5.2 U5.3
NetR22_1: R22.1 U4.35
NetR23_1: R23.1 U4.34
NetR24_1: R24.1 U4.9 U7.1
NetU4_7: U4.7 U5.5 U5.10
NetU4_20: U4.20 U9.2
NetU4_21: U4.21 U9.3
NetU4_24: U4.24 U10.10
NetU4_25: U4.25 U10.3
NetU4_26: U4.26 U10.7
NetU4_27: U4.27 U10.9
NetU4_36: U4.36 U8.12
NetU4_37: U4.37 U8.9
NetU4_38: U4.38 U8.24
NetU4_39: U4.39 U8.23
NetU4_41: U4.41 U6.1
NetU4_42: U4.42 U6.6
NetU4_43: U4.43 U6.2
NetU4_44: U4.44 U6.5
NetU4_45: U4.45 U6.7
NetU4_46: U4.46 U6.3
NetU4_48: U4.48 U8.22
NetU4_58: U4.58 U10.1
NetU4_59: U4.59 U10.6
"VCC_CHARGE 3.0 - 4.2 V": C8.1 G1.1 P1.2 U1.14 U3.3 U3.4
"VCC_LOAD 1.8 V": C9.1 C15.1 C18.1 C19.1 C20.1 C22.1 C23.1 R19.1 U2.6 U6.8 U8.8 U8.13 U9.1 U10.4
"VCC_MAIN 1.8 V": C7.1 C11.1 C16.1 L2.1 P1.1 U2.5 U4.28 U4.30 U7.5
"VCC_STORE 3.0 - 4.2 V": C1.1 C2.1 C5.1 C14.1 R16.2 R18.2 U1.15 U2.1 U5.7
"VCC_USB 5.0 V": C6.1 P1.7 P2.1 R1.1 U3.1 U3.2 U4.32 VD5.2
pads on no net: Designator3.0 Designator4.0 Designator5.0 Designator6.0 Designator7.0 Designator8.0 P2.4 U2.7 U3.7 U4.3 U4.5 U4.8 U4.10 U4.11 U4.12 U4.13 U4.19 U4.22 U4.23 U4.29 U4.31 U4.40 U4.47 U4.49 U4.50 U4.52 U4.54 U4.56 U4.57 U4.60 U4.61 U8.1 U8.2 U8.3 U8.4 U8.5 U8.6 U8.7 U8.14 U8.15 U8.16 U8.17 U8.19 U8.21 U10.2 U10.8

## Polygon pours and split planes (outlines as drawn)
"VCC_LOAD 1.8 V" on Top Power Plane "VCC_LOAD_1.8_V_L01_P026" (solid, remove dead copper, shelved, pour order 26): 13.483,-17.983 14.666,-13.524 15.752,-9.037 16.742,-4.516 17.633,0.028 18.349,4.133 18.953,8.035 19.483,11.945 19.493,12.574 19.366,13.189 19.108,13.762 18.731,14.264 18.254,14.673 17.699,14.968 13.978,16.394 10.218,17.727 6.418,18.966 2.97,19.999 -0.497,20.952 -3.981,21.824 -7.475,22.614 -9.651,23.063 -11.832,23.481 -12.405,23.527 -12.976,23.459 -13.521,23.279 -14.02,22.993 -14.451,22.613 -14.799,22.156 -15.048,21.638 -15.189,21.081 -15.59,18.029 -15.864,15.281 -16.051,12.573 -16.161,9.583 -16.174,6.898 -16.104,4.225 -15.952,1.565 -15.718,-1.082 -15.403,-3.717 -14.957,-6.634 -14.41,-9.538 -13.762,-12.432 -13.091,-15.028 -12.338,-17.611 -11.403,-20.474 -10.849,-22.033 -10.267,-23.581 -10.003,-24.101 -9.639,-24.556 -9.191,-24.929 -8.677,-25.203 -8.118,-25.367 -7.537,-25.415 -5.086,-25.317 -2.636,-25.117 -0.18,-24.815 2.019,-24.458 4.2,-24.02 6.355,-23.503 7.568,-23.174 8.774,-22.819 9.597,-22.509 10.375,-22.099 11.096,-21.595 11.748,-21.004 12.321,-20.337 12.806,-19.603 13.195,-18.814
GND on Bottom Signal Layer "GND_L04_P020" (solid, remove dead copper, shelved, pour order 20): 13.483,-17.983 14.666,-13.524 15.752,-9.037 16.742,-4.516 17.633,0.028 18.349,4.133 18.953,8.035 19.483,11.945 19.493,12.574 19.366,13.189 19.108,13.762 18.731,14.264 18.254,14.673 17.699,14.968 13.978,16.394 10.218,17.727 6.418,18.966 2.97,19.999 -0.497,20.952 -3.981,21.824 -7.475,22.614 -9.651,23.063 -11.832,23.481 -12.405,23.527 -12.976,23.459 -13.521,23.279 -14.02,22.993 -14.451,22.613 -14.799,22.156 -15.048,21.638 -15.189,21.081 -15.59,18.029 -15.864,15.281 -16.051,12.573 -16.161,9.583 -16.174,6.898 -16.104,4.225 -15.952,1.565 -15.718,-1.082 -15.403,-3.717 -14.957,-6.634 -14.41,-9.538 -13.762,-12.432 -13.091,-15.028 -12.338,-17.611 -11.403,-20.474 -10.849,-22.033 -10.267,-23.581 -10.003,-24.101 -9.639,-24.556 -9.191,-24.929 -8.677,-25.203 -8.118,-25.367 -7.537,-25.415 -5.086,-25.317 -2.636,-25.117 -0.18,-24.815 2.019,-24.458 4.2,-24.02 6.355,-23.503 7.568,-23.174 8.774,-22.819 9.597,-22.509 10.375,-22.099 11.096,-21.595 11.748,-21.004 12.321,-20.337 12.806,-19.603 13.195,-18.814
"VCC_LOAD 1.8 V" on Bottom Signal Layer "VCC_LOAD_1.8_V_L04_P000" (solid, remove dead copper, shelved, pour order 0): 12.396,12.875 2.337,14.466 2.822,18.29 9.279,17.247 12.85,16.031
"VCC_CHARGE 3.0 - 4.2 V" on Bottom Signal Layer "VCC_CHARGE_3.0_-_4.2_V_L04_P017" (solid, shelved, pour order 17): 9.806,-17.062 9.652,-16.565 8.256,-16.345 8.102,-17.33 8.924,-17.458 9.52,-17.055 9.52,-17.189
NetL1_2 on Bottom Signal Layer "NETL1_2_L04_P015" (solid, shelved, pour order 15): 11.431,-15.384 10.688,-13.446 9.777,-13.446 10.527,-15.652 10.527,-17.209 10.789,-17.323 11.201,-16.911
"VCC_CHARGE 3.0 - 4.2 V" on Internal Signal Plane "VCC_CHARGE_3.0_-_4.2_V_L03_P021" (solid, remove dead copper, shelved, pour order 21): 7.491,-16.683 -0.63,-15.602 -7.234,-7.152 -12.755,-5.181 -13.07,-5.654 -3.052,-18.034 3.028,-19.069 7.55,-17.262
"VCC_MAIN 1.8 V" on Internal Signal Plane "VCC_MAIN_1.8_V_L03_P023" (solid, remove dead copper, shelved, pour order 23): 13.483,-17.983 14.666,-13.524 15.752,-9.037 16.742,-4.516 17.633,0.028 18.349,4.133 18.953,8.035 19.483,11.945 19.493,12.574 19.366,13.189 19.108,13.762 18.731,14.264 18.254,14.673 17.699,14.968 13.978,16.394 10.218,17.727 6.418,18.966 2.97,19.999 -0.497,20.952 -3.981,21.824 -7.475,22.614 -9.651,23.063 -11.832,23.481 -12.405,23.527 -12.976,23.459 -13.521,23.279 -14.02,22.993 -14.451,22.613 -14.799,22.156 -15.048,21.638 -15.189,21.081 -15.59,18.029 -15.864,15.281 -16.051,12.573 -16.161,9.583 -16.174,6.898 -16.104,4.225 -15.952,1.565 -15.718,-1.082 -15.403,-3.717 -14.957,-6.634 -14.41,-9.538 -13.762,-12.432 -13.091,-15.028 -12.338,-17.611 -11.403,-20.474 -10.849,-22.033 -10.267,-23.581 -10.003,-24.101 -9.639,-24.556 -9.191,-24.929 -8.677,-25.203 -8.118,-25.367 -7.537,-25.415 -5.086,-25.317 -2.636,-25.117 -0.18,-24.815 2.019,-24.458 4.2,-24.02 6.355,-23.503 7.568,-23.174 8.774,-22.819 9.597,-22.509 10.375,-22.099 11.096,-21.595 11.748,-21.004 12.321,-20.337 12.806,-19.603 13.195,-18.814
GND on Internal Ground Plane "GND_L02_P025" (solid, remove dead copper, shelved, pour order 25): 13.483,-17.983 14.666,-13.524 15.752,-9.037 16.742,-4.516 17.633,0.028 18.349,4.133 18.953,8.035 19.483,11.945 19.493,12.574 19.366,13.189 19.108,13.762 18.731,14.264 18.254,14.673 17.699,14.968 13.978,16.394 10.218,17.727 6.418,18.966 2.97,19.999 -0.497,20.952 -3.981,21.824 -7.475,22.614 -9.651,23.063 -11.832,23.481 -12.405,23.527 -12.976,23.459 -13.521,23.279 -14.02,22.993 -14.451,22.613 -14.799,22.156 -15.048,21.638 -15.189,21.081 -15.59,18.029 -15.864,15.281 -16.051,12.573 -16.161,9.583 -16.174,6.898 -16.104,4.225 -15.952,1.565 -15.718,-1.082 -15.403,-3.717 -14.957,-6.634 -14.41,-9.538 -13.762,-12.432 -13.091,-15.028 -12.338,-17.611 -11.403,-20.474 -10.849,-22.033 -10.267,-23.581 -10.003,-24.101 -9.639,-24.556 -9.191,-24.929 -8.677,-25.203 -8.118,-25.367 -7.537,-25.415 -5.086,-25.317 -2.636,-25.117 -0.18,-24.815 2.019,-24.458 4.2,-24.02 6.355,-23.503 7.568,-23.174 8.774,-22.819 9.597,-22.509 10.375,-22.099 11.096,-21.595 11.748,-21.004 12.321,-20.337 12.806,-19.603 13.195,-18.814

## Other copper
Internal Ground Plane:
  pour cut-out: 2.85,2.85 cw(c0,0) 2.85,-2.85 cw(c0,0) -2.85,-2.85 cw(c0,0) -2.85,2.85 cw(c0,0)
  pour cut-out: 20.274,15.397 15.242,16.194 13.918,7.836 12.733,8.024 12.483,6.444 13.668,6.256 13.058,2.404 16.811,1.81 18.201,1.606
Internal Signal Plane:
  pour cut-out: 2.85,2.85 cw(c0,0) 2.85,-2.85 cw(c0,0) -2.85,-2.85 cw(c0,0) -2.85,2.85 cw(c0,0)
  pour cut-out: -0.648,23.575 -3.167,7.673 -18.476,10.097 -15.957,25.999
  pour cut-out: 20.274,15.397 15.242,16.194 13.918,7.836 12.733,8.024 12.483,6.444 13.668,6.256 13.058,2.404 16.811,1.81 18.201,1.606
Bottom Signal Layer:
  pour cut-out: -8.141,-11.413 -6.5,-10.967 -5.901,-13.117 -7.559,-13.558
  pour cut-out: -5.618,-4.51 -6.177,-4.4 -6.177,-4.909 -6.199,-4.931

## Silkscreen, mask and mechanical layers (free items; w line width, h text height)
Top Overlay:
  drawing of 440 lines, arcs and shapes, not listed
Bottom Overlay:
  lines w0.2: -14.623,10.004 -14.346,11.757 -6.563,10.525 -6.841,8.771 -14.623,10.004 ; -1.822,2.448 ccw(c0.021,-0.164) 2.669,1.626 1.508,0.823 cw(c0.067,-0.172) -1.295,0.928 -0.52,0.805 -0.747,-0.63 0.673,-0.855 1.118,1.988 -1.822,2.448
  text "Rev. 1.5" at -7.475,9.325 h0.9 r351
Top Solder:
  lines w1.6: -14.7,7.275 -1.475,9.175 ; -14.1,-3.275 -0.875,-6.525 ; -14.1,4.2 -0.875,6.125 ; -13.5,-6.65 -1.475,-9.575 ; 0.845,11.766 17.692,9.083 ; 0.875,-8.35 15.3,-5.075 ; 1.475,-5.025 15.9,-1.75 ; 1.475,14.874 17.096,12.386
Mechanical 1:
  the board outline again, w0.15
Mechanical 2:
  the board outline again, w1.6
Mechanical 15:
  the board outline again, w0.15

## Text inside footprints (layer, text, board x,y; h text height)
G1: Bottom Overlay "-" at -6.691,2.416 h1.5 r81; Bottom Overlay "+" at -7.547,-3.624 h1.5 r81